# Altium PCB USB_Downloader_V1.2.PcbDoc
Units mil, origin at the board's own origin, x right, y up, seen from the top; angles counter-clockwise.
Board outline 2108 x 919.09 mil, 2 copper layers (Top Layer, Bottom Layer); 52 components, 75 nets, 262 pads, 73 vias.
Unrouted connection lines stored in the file: 1.
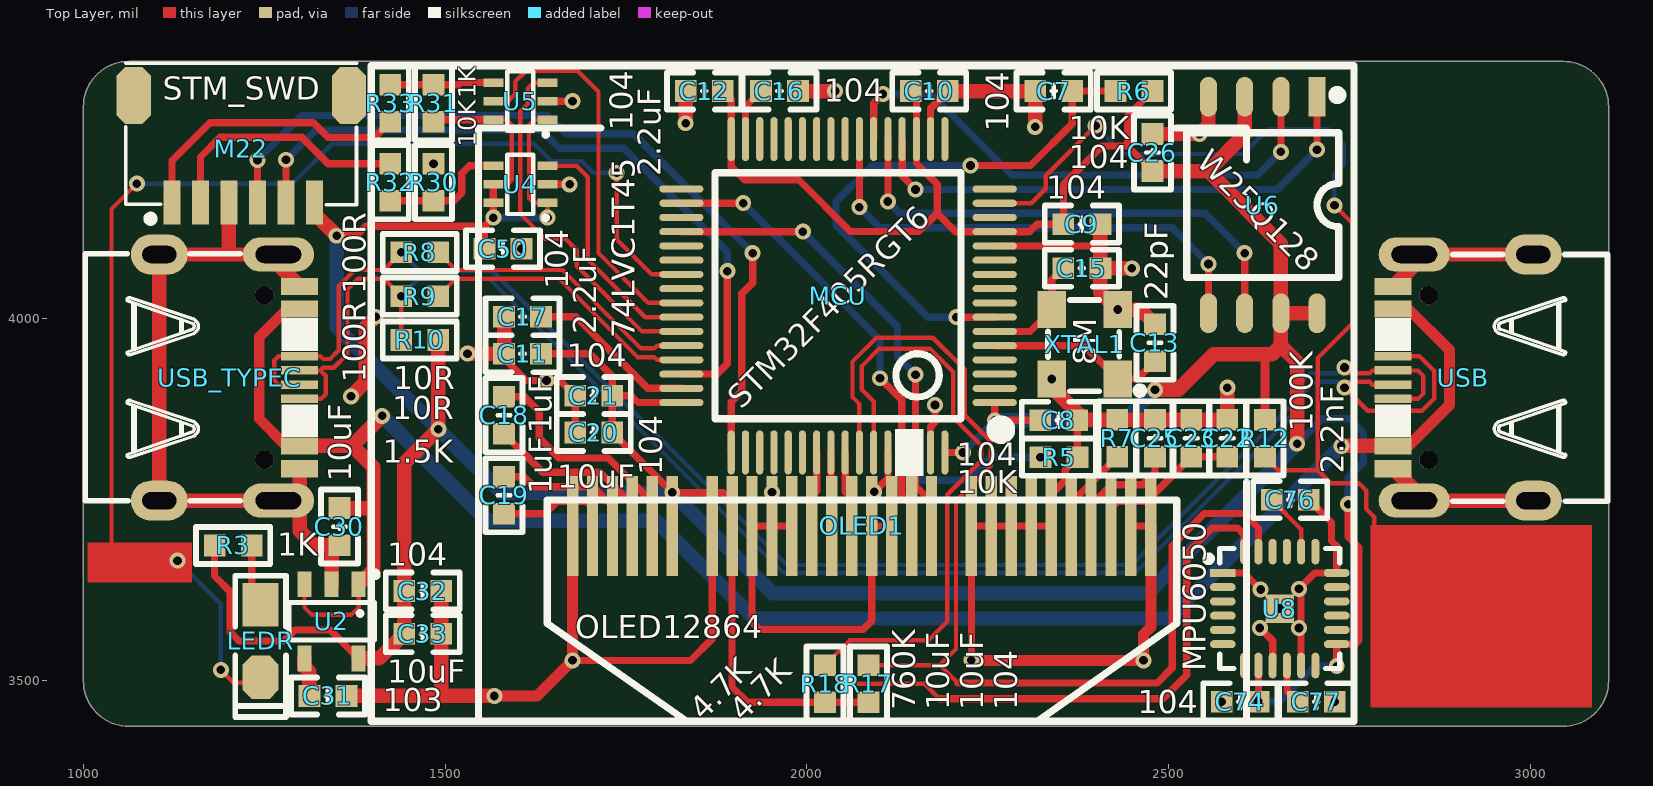
[diagram p0: Top Layer view]
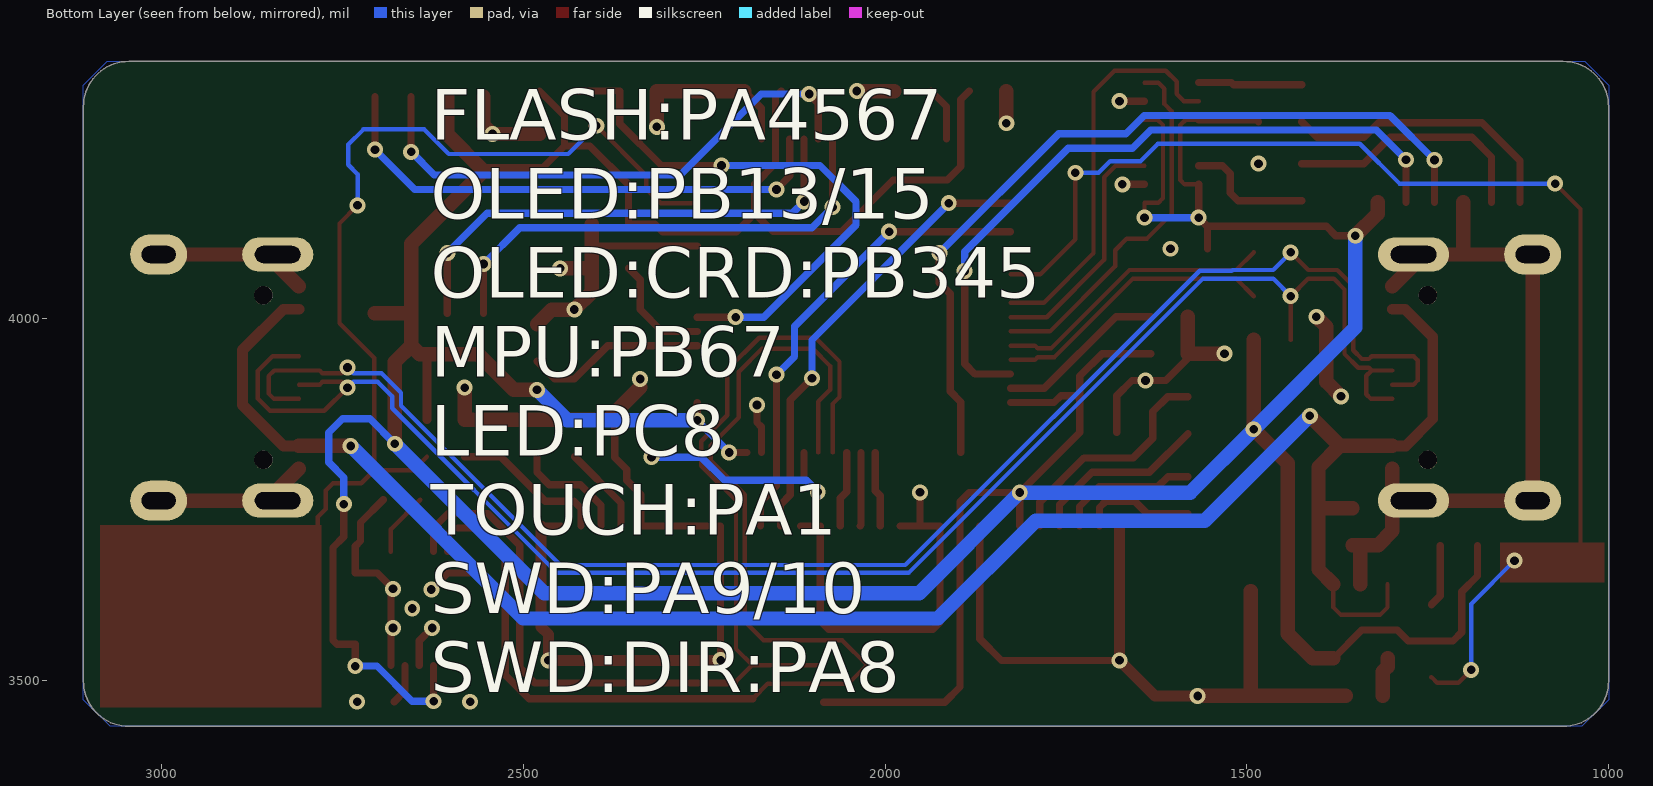
[diagram p1: Bottom Layer view, seen from below]

## Layer stack, top to bottom
Top Solder: solder mask 0.4, Solder Resist, Dk 3.5
Top Layer: signal copper 1.4
Dielectric 1: dielectric 12.6, FR-4, Dk 4.8
Bottom Layer: signal copper 1.4
Bottom Solder: solder mask 0.4, Solder Resist, Dk 3.5

## Board outline
1000,3498.9 1000,4292.01 cw(c1062.99,4292.01) 1062.99,4355 3045.01,4355 cw(c3045.01,4292.01) 3108,4292.01 3108,3498.9 cw(c3045.01,3498.9) 3045.01,3435.91 1062.99,3435.91 cw(c1062.99,3498.9)

## Design rules (kind name [scope] priority, off if disabled: settings)
AssemblyTestPointUsage [All] p0: scope1count=1 scope1_0_kind=Board scope1_0_value=Board scope2count=1 scope2_0_kind=Board scope2_0_value=Board commentlength=0
AssemblyTestpoint [All] p0: scope1count=1 scope1_0_kind=Board scope1_0_value=Board scope2count=1 scope2_0_kind=Board scope2_0_value=Board commentlength=0
Clearance [All] p0: scope1count=1 scope1_0_kind=Board scope1_0_value=Board scope2count=1 scope2_0_kind=Board scope2_0_value=Board commentlength=0 gap=10
Clearance [All] p1: gap=10 except(2: Arc-SMDPad SMDPad-SMDPad SMDPad-THPad SMDPad-Via SMDPad-Fill SMDPad-Region SMDPad-Text; 5: Track-Track Track-SMDPad Track-THPad Track-Via Track-Fill Track-Region Track-Text; 12: Arc-Poly Track-Poly SMDPad-Poly THPad-Poly Via-Poly Fill-Poly Poly-Poly)
ComponentClearance [All] p0: scope1count=1 scope1_0_kind=Board scope1_0_value=Board scope2count=1 scope2_0_kind=Board scope2_0_value=Board commentlength=0 gap=10 collisioncheckmode=3
DiffPairsRouting [All] p0 off: scope1count=1 scope1_0_kind=Board scope1_0_value=Board scope2count=1 scope2_0_kind=Board scope2_0_value=Board commentlength=63 // Protel DXP Scope 1 Expression Was: InDifferentialPair('US')
DiffPairsRouting DiffPair_USBDiffPairsRouting [All] p0 off: scope1count=1 scope1_0_kind=Board scope1_0_value=Board scope2count=1 scope2_0_kind=Board scope2_0_value=Board commentlength=65 // Protel DXP Scope 1 Expression Was: InDifferentialPair('USBB')
DiffPairsRouting DiffPairsRouting_1 [All] p0: scope1count=1 scope1_0_kind=Board scope1_0_value=Board scope2count=1 scope2_0_kind=Board scope2_0_value=Board commentlength=0
DiffPairsRouting DiffPairsRouting_1 [All] p1: maxlimit=6 minlimit=6 mostfreqgap=6 toplayer_minwidth=6 toplayer_maxwidth=6 toplayer_prefwidth=6 bottomlayer_minwidth=6 bottomlayer_maxwidth=6 bottomlayer_prefwidth=6 maxuncoupledlength=500
DiffPairsRouting DiffPair_USBDiffPairsRouting [InDifferentialPair('USBB')] p2: maxlimit=6 minlimit=6 mostfreqgap=6 toplayer_minwidth=6 toplayer_maxwidth=6 toplayer_prefwidth=6 bottomlayer_minwidth=6 bottomlayer_maxwidth=6 bottomlayer_prefwidth=6 maxuncoupledlength=500
DiffPairsRouting [InDifferentialPair('US')] p3: maxlimit=6 minlimit=6 mostfreqgap=6 toplayer_minwidth=6 toplayer_maxwidth=6 toplayer_prefwidth=6 bottomlayer_minwidth=6 bottomlayer_maxwidth=6 bottomlayer_prefwidth=6 maxuncoupledlength=500
FabricationTestPointUsage [All] p0: scope1count=1 scope1_0_kind=Board scope1_0_value=Board scope2count=1 scope2_0_kind=Board scope2_0_value=Board commentlength=0 valid=0 allowmultiple=FALSE
FabricationTestpoint [All] p0: scope1count=1 scope1_0_kind=Board scope1_0_value=Board scope2count=1 scope2_0_kind=Board scope2_0_value=Board commentlength=0 side=3 testpointundercomponent=TRUE minsize=40 maxsize=100 preferedsize=60 minholesize=0 maxholesize=40 preferedholesize=32 testpointgrid=1
FanoutControl Fanout_Default [All] p0: scope1count=1 scope1_0_kind=Board scope1_0_value=Board scope2count=1 scope2_0_kind=Board scope2_0_value=Board commentlength=30 // Fanout_Default (Default Rule)
FanoutControl Fanout_Small [All] p0 off: scope1count=1 scope1_0_kind=Board scope1_0_value=Board scope2count=1 scope2_0_kind=Board scope2_0_value=Board commentlength=84 // Protel DXP Scope 1 Expression Was: (CompPinCount < 5)   Fanout_Small (Default Rule)
FanoutControl Fanout_SOIC [All] p0 off: scope1count=1 scope1_0_kind=Board scope1_0_value=Board scope2count=1 scope2_0_kind=Board scope2_0_value=Board commentlength=71 // Protel DXP Scope 1 Expression Was: IsSOIC   Fanout_SOIC (Default Rule)
FanoutControl Fanout_LCC [All] p0 off: scope1count=1 scope1_0_kind=Board scope1_0_value=Board scope2count=1 scope2_0_kind=Board scope2_0_value=Board commentlength=69 // Protel DXP Scope 1 Expression Was: IsLCC   Fanout_LCC (Default Rule)
FanoutControl Fanout_BGA [All] p0 off: scope1count=1 scope1_0_kind=Board scope1_0_value=Board scope2count=1 scope2_0_kind=Board scope2_0_value=Board commentlength=69 // Protel DXP Scope 1 Expression Was: IsBGA   Fanout_BGA (Default Rule)
Height [All] p0: scope1count=1 scope1_0_kind=Board scope1_0_value=Board scope2count=1 scope2_0_kind=Board scope2_0_value=Board commentlength=0
HoleSize [All] p0: scope1count=1 scope1_0_kind=Board scope1_0_value=Board scope2count=1 scope2_0_kind=Board scope2_0_value=Board commentlength=0 absolutevalues=TRUE maxlimit=100 minlimit=1 maxpercent=80.000 minpercent=20.000
HoleToHoleClearance [All] p0: scope1count=1 scope1_0_kind=Board scope1_0_value=Board scope2count=1 scope2_0_kind=Board scope2_0_value=Board commentlength=0
LayerPairs [All] p0: scope1count=1 scope1_0_kind=Board scope1_0_value=Board scope2count=1 scope2_0_kind=Board scope2_0_value=Board commentlength=0 enforce=TRUE
MatchedLengths DiffPair_USBMatchedLengths_1 [All] p0 off: scope1count=1 scope1_0_kind=Board scope1_0_value=Board scope2count=1 scope2_0_kind=Board scope2_0_value=Board commentlength=65 tolerance=1000 amplitude=200 gap=20 style=90-Degree // Protel DXP Scope 1 Expression Was: InDifferentialPair ('USB')
MatchedLengths DiffPair_USBMatchedLengths [All] p0: scope1count=1 scope1_0_kind=Board scope1_0_value=Board scope2count=1 scope2_0_kind=Board scope2_0_value=Board commentlength=0 tolerance=1000 amplitude=200 gap=20 style=90-Degree
MatchedLengths DiffPair_USBMatchedLengths [All] p1: tolerance=1000 checknetsindiffpair=FALSE checkdiffpairvsdiffpair=TRUE checkxsignals=TRUE checkothers=TRUE
MatchedLengths DiffPair_USBMatchedLengths_1 [InDifferentialPair ('USB')] p2: tolerance=1000 checknetsindiffpair=FALSE checkdiffpairvsdiffpair=TRUE checkxsignals=TRUE checkothers=TRUE
MinimumSolderMaskSliver [All] p0: scope1count=1 scope1_0_kind=Board scope1_0_value=Board scope2count=1 scope2_0_kind=Board scope2_0_value=Board commentlength=0
NetAntennae [All] p0: scope1count=1 scope1_0_kind=Board scope1_0_value=Board scope2count=1 scope2_0_kind=Board scope2_0_value=Board commentlength=0
PasteMaskExpansion [All] p0: scope1count=1 scope1_0_kind=Board scope1_0_value=Board scope2count=1 scope2_0_kind=Board scope2_0_value=Board commentlength=0 expansion=0
PlaneClearance [All] p0: scope1count=1 scope1_0_kind=Board scope1_0_value=Board scope2count=1 scope2_0_kind=Board scope2_0_value=Board commentlength=0 clearance=20
PlaneConnect [All] p0: scope1count=1 scope1_0_kind=Board scope1_0_value=Board scope2count=1 scope2_0_kind=Board scope2_0_value=Board commentlength=0 planeconnectstyle=Direct reliefexpansion=20 reliefentries=4 reliefconductorwidth=10 reliefairgap=10
PlaneConnect [All] p1: planeconnectstyle=Direct reliefexpansion=20 reliefentries=4 reliefconductorwidth=10 reliefairgap=10
PolygonConnect [All] p0: scope1count=1 scope1_0_kind=Board scope1_0_value=Board scope2count=1 scope2_0_kind=Board scope2_0_value=Board commentlength=0 connectstyle=Direct reliefconductorwidth=10 reliefentries=4 polygonreliefangle="90 Angle"
PolygonConnect [All] p1: connectstyle=Direct reliefconductorwidth=10 reliefentries=4 polygonreliefangle="90 Angle" airgapwidth=10
RoomDefinition USB_Downloader [All] p0: scope1count=1 scope1_0_kind=ComponentClass scope1_0_value=USB_Downloader scope2count=1 scope2_0_kind=Board scope2_0_value=Board commentlength=0 region_x1=0 region_y1=0 region_x2=20000000 region_y2=10000000 confinementstyle=ConfineIn
RoomDefinition USB_Downloader [InComponentClass('USB_Downloader')] p1: confinementstyle=ConfineIn formatcopy=TRUE lockcomponents=FALSE outline 0,0 2000,0 2000,1000 0,1000
RoutingCorners [All] p0: scope1count=1 scope1_0_kind=Board scope1_0_value=Board scope2count=1 scope2_0_kind=Board scope2_0_value=Board commentlength=0 cornerstyle=45-Degree minsetback=100 maxsetback=100
RoutingLayers [All] p0: scope1count=1 scope1_0_kind=Board scope1_0_value=Board scope2count=1 scope2_0_kind=Board scope2_0_value=Board commentlength=0 top layer=Automatic bottom layer=Automatic
RoutingPriority [All] p0: scope1count=1 scope1_0_kind=Board scope1_0_value=Board scope2count=1 scope2_0_kind=Board scope2_0_value=Board commentlength=0
RoutingTopology [All] p0: scope1count=1 scope1_0_kind=Board scope1_0_value=Board scope2count=1 scope2_0_kind=Board scope2_0_value=Board commentlength=0 topology=Shortest
RoutingVias [All] p0: scope1count=1 scope1_0_kind=Board scope1_0_value=Board scope2count=1 scope2_0_kind=Board scope2_0_value=Board commentlength=0 holewidth=12 width=22 viastyle="Through Hole" minholewidth=12 minwidth=22 maxholewidth=200 maxwidth=500
RoutingVias [All] p1: holewidth=12 width=22 viastyle="Through Hole" minholewidth=12 minwidth=22 maxholewidth=200 maxwidth=500
ShortCircuit [All] p0: scope1count=1 scope1_0_kind=Board scope1_0_value=Board scope2count=1 scope2_0_kind=Board scope2_0_value=Board commentlength=0 allowed=FALSE
SilkToBoardRegionClearance [All] p0: scope1count=1 scope1_0_kind=Board scope1_0_value=Board scope2count=1 scope2_0_kind=Board scope2_0_value=Board commentlength=0
SilkToSilkClearance [All] p0: scope1count=1 scope1_0_kind=Board scope1_0_value=Board scope2count=1 scope2_0_kind=Board scope2_0_value=Board commentlength=0
SilkToSolderMaskClearance [All] p0 off: scope1count=1 scope1_0_kind=Board scope1_0_value=Board scope2count=1 scope2_0_kind=Board scope2_0_value=Board commentlength=44 // Protel DXP Scope 1 Expression Was: IsPad
SolderMaskExpansion [All] p0: scope1count=1 scope1_0_kind=Board scope1_0_value=Board scope2count=1 scope2_0_kind=Board scope2_0_value=Board commentlength=0 expansion=4
SolderMaskExpansion [All] p1: expansion=4
UnRoutedNet [All] p0: scope1count=1 scope1_0_kind=Board scope1_0_value=Board scope2count=1 scope2_0_kind=Board scope2_0_value=Board commentlength=0
UnpouredPolygon [All] p0: scope1count=1 scope1_0_kind=Board scope1_0_value=Board scope2count=1 scope2_0_kind=Board scope2_0_value=Board commentlength=0
Width [All] p0: scope1count=1 scope1_0_kind=Board scope1_0_value=Board scope2count=1 scope2_0_kind=Board scope2_0_value=Board commentlength=0 maxlimit=200 minlimit=6 preferedwidth=10
Width [All] p1: maxlimit=200 minlimit=6 preferedwidth=10 minimp=50.000000 maximp=50.000000 favimp=50.000000
28 further rules are at their usual default settings.

## Components (designator, comment, footprint, x,y, rotation, side; value= is the part's Value field where it differs from the comment)
C7 "104" "C 0603_L" 2341,4314.01 r0 top
C8 "104" "C 0603_L" 2348,3859 r180 top
C9 "104" "C 0603_L" 2380,4130 r180 top
C10 "104" "C 0603_L" 2169,4314 r180 top
C11 "104" "C 0603_L" 1607,3951 r0 top
C12 "104" "C 0603_L" 1858,4314.01 r0 top
C13 "22pF" "C 0603_L" 2481,3966 r270 top
C15 "22pF" "C 0603_L" 2380,4069 r180 top
C16 "2.2uF" "C 0603_L" 1962,4314 r180 top
C17 "2.2uF" "C 0603_L" 1607,4002 r0 top
C18 "1uF" "C 0603_L" 1581.41,3866 r270 top
C19 "1uF" "C 0603_L" 1581.41,3755.41 r270 top
C20 "104" "C 0603_L" 1705.41,3842 r0 top
C21 "10uF" "C 0603_L" 1705.41,3893 r0 top
C22 "104" "C 0603_L" 2581,3834 r270 top
C23 "10uF" "C 0603_L" 2531,3834 r270 top
C25 "10uF" "C 0603_L" 2481,3834 r270 top
C26 "104" "C 0603_L" 2477.58,4229 r90 top
C30 "10uF" "C 0603_L" 1354,3712 r270 top
C31 "103" "C 0603_L" 1338,3478 r180 top
C32 "104" "C 0603_L" 1469,3623 r180 top
C33 "10uF" "C 0603_L" 1469,3564 r180 top
C50 "104" "C 0603_L" 1580,4096 r180 top
C74 "104" "C 0603_L" 2599,3470 r0 top
C76 "2.2nF" "C 0603_L" 2668,3749 r180 top
C77 "104" "C 0603_L" 2704,3470 r0 top
LEDR "LED1" "LED 0805B" 1245,3554 r270 top
M22 "STM_SWD" SH1.0-6P 1122.53,4160 r0 top
MCU "STM32F405RGT6" "LQFP64 10X10_L" 2043,4031 r90 top
OLED1 "OLED12864" OLED_0.96 1676.12,3712.93 r0 top locked
R3 "1K" "R 0603_L" 1207,3686 r0 top
R5 "10K" "R 0603_L" 2348.41,3808 r180 top
R6 "10K" "R 0603_L" 2452,4314.01 r0 top
R7 "760K" "R 0603_L" 2429,3834 r270 top
R8 "10R" "R 0603_L" 1465,4091 r0 top
R9 "10R" "R 0603_L" 1465,4030.5 r0 top
R10 "1.5K" "R 0603_L" 1464.99,3970 r180 top
R12 "100K" "R 0603_L" 2633,3834 r90 top
R17 "4.7K" "R 0603_L" 2085,3495 r90 top
R18 "4.7K" "R 0603_L" 2025,3495 r90 top
R30 "10K" "R 0603_L" 1484,4188 r90 top
R31 "1K" "R 0603_L" 1484,4297 r270 top
R32 "100R" "R 0603_L" 1424,4188 r270 top
R33 "100R" "R 0603_L" 1424,4297 r90 top
U2 "CAT6219-330TD" SOT23-5L 1343,3581 r180 top
U4 "74LVC1T45" SOT363-6L 1604,4185 r180 top
U5 "74LVC1T45" SOT363-6L 1604,4300 r180 top
U6 "W25Q128" SOP8W_L 2630,4156.39 r270 top
U8 "MPU6050" "QFN24 4x4_N" 2653.47,3598.74 r270 top locked
USB "USB TypeC" "USB Type-C" 2907,3918 r90 top
USB_TYPEC "USB TypeC" "USB Type-C" 1202,3918 r270 top
XTAL1 "8M" "XTAL3225   无源" 2384,3964 r90 top

## Footprints (in the part's own frame and the unit in brackets; to place one, negate y for a bottom-side part, rotate by r counter-clockwise, add the part's x,y. Pads: shape width x height; smd on the part's side, far side on the other; paste and mask are expansions set on the pad)
"C 0603_L" [mil] "无极性贴片电容"
  rect 30x30 smd: 1(-25.59,0) 2(25.59,0)
  silkscreen extent -51,-26 51,26
"LED 0805B" [mil] "蓝色0805LED"
  rect 60x50 smd: 1(-50,0)
  oct 60x50 smd: 2(50,0)
  silkscreen extent -90,-35 105,35
"LQFP64 10X10_L" [mm]
  oval 0.25x1.55 smd: 1(-3.75,-5.5) 2(-3.25,-5.5) 3(-2.75,-5.5) 4(-2.25,-5.5) 5(-1.75,-5.5) 6(-1.25,-5.5) 7(-0.75,-5.5) 8(-0.25,-5.5) 9(0.25,-5.5) 10(0.75,-5.5) 11(1.25,-5.5) 12(1.75,-5.5) 13(2.25,-5.5) 14(2.75,-5.5) 15(3.25,-5.5) 16(3.75,-5.5) 33(3.75,5.5) 34(3.25,5.5) 35(2.75,5.5) 36(2.25,5.5) 37(1.75,5.5) 38(1.25,5.5) 39(0.75,5.5) 40(0.25,5.5) 41(-0.25,5.5) 42(-0.75,5.5) 43(-1.25,5.5) 44(-1.75,5.5) 45(-2.25,5.5) 46(-2.75,5.5) 47(-3.25,5.5) 48(-3.75,5.5)
  oval 1.55x0.25 smd: 17(5.5,-3.75) 18(5.5,-3.25) 19(5.5,-2.75) 20(5.5,-2.25) 21(5.5,-1.75) 22(5.5,-1.25) 23(5.5,-0.75) 24(5.5,-0.25) 25(5.5,0.25) 26(5.5,0.75) 27(5.5,1.25) 28(5.5,1.75) 29(5.5,2.25) 30(5.5,2.75) 31(5.5,3.25) 32(5.5,3.75) 49(-5.499,3.75) 50(-5.499,3.25) 51(-5.499,2.75) 52(-5.499,2.25) 53(-5.499,1.75) 54(-5.499,1.25) 55(-5.499,0.75) 56(-5.499,0.25) 57(-5.499,-0.25) 58(-5.499,-0.75) 59(-5.499,-1.25) 60(-5.499,-1.75) 63(-5.499,-3.25) 64(-5.499,-3.75)
  silkscreen extent -4.95,-5.97 4.32,4.32
OLED_0.96 [mm]
  rect 0.4x3.5 smd: 1(0,0) 2(0.7,0) 3(1.4,0) 4(2.1,0) 5(2.8,0) 6(3.5,0) 8(4.9,0) 9(5.6,0) 10(6.3,0) 11(7,0) 12(7.7,0) 13(8.4,0) 14(9.1,0) 15(9.8,0) 16(10.5,0) 17(11.2,0) 18(11.9,0) 19(12.6,0) 21(14,0) 22(14.7,0) 23(15.4,0) 24(16.1,0) 25(16.8,0) 26(17.5,0) 27(18.2,0) 28(18.9,0) 29(19.6,0) 30(20.3,0)
  silkscreen extent -3.3,-6.86 23.66,13.97
"QFN24 4x4_N" [mm] "24脚，长x宽x高：4x4x1mm，脚距：0.5mm"
  rect 0.28x0.9 smd: 1(-1.25,-2)
  oval 0.28x0.9 smd: 2(-0.75,-2) 3(-0.25,-2) 4(0.25,-2) 5(0.75,-2) 6(1.25,-2) 13(1.25,2) 14(0.75,2) 15(0.25,2) 16(-0.25,2) 17(-0.75,2) 18(-1.25,2)
  oval 0.9x0.28 smd: 7(2,-1.25) 8(2,-0.75) 9(2,-0.25) 10(2,0.25) 11(2,0.75) 12(2,1.25) 19(-2,1.25) 20(-2,0.75) 21(-2,0.25) 22(-2,-0.25) 23(-2,-0.75) 24(-2,-1.25)
  rect 1x1 smd: 25(0,0)
  silkscreen extent -2.11,-2.6 2.11,2.11
"R 0603_L" [mil] "1/10W贴片电阻"
  rect 30x30 smd: 1(-25.59,0) 2(25.59,0)
  silkscreen extent -51,-26 51,26
SH1.0-6P [mm]
  rect 0.6x1.55 smd: 1(0,0) 2(1,0) 3(2,0) 4(3,0) 5(4,0) 6(5,0)
  oct 1.2x2 smd: A(-1.346,3.759) B(6.21,3.759)
  silkscreen extent -1.63,-0.7 6.48,4.89
SOP8W_L [mm]
  rect 1.4x0.6 smd: 1(-3.8,1.905)
  oval 1.4x0.6 smd: 2(-3.8,0.635) 3(-3.8,-0.635) 4(-3.8,-1.905) 5(3.8,-1.905) 6(3.8,-0.635) 7(3.8,0.635) 8(3.8,1.905)
  silkscreen extent -3.99,-2.67 2.54,2.74
SOT23-5L [mm]
  rect 0.5x0.9 smd: 1(-0.95,-1.3) 2(0,-1.3) 3(0.95,-1.3) 4(0.95,1.3) 5(-0.95,1.3)
  silkscreen extent -1.6,-1.73 1.5,0.66
SOT363-6L [mm]
  rect 0.7x0.3 smd: 1(-0.95,0.65) 2(-0.95,0) 3(-0.95,-0.65) 4(0.95,-0.65) 5(0.95,0) 6(0.95,0.65)
  silkscreen extent -0.97,-1.04 0.46,1.24
"USB Type-C" [mm] "USB Type-C 12P/16P"
  rect 0.6x1.3 smd mask+0: 1(-3.2,2.462) 2(-2.4,2.462) 11(2.4,2.462) 12(3.2,2.462)
  rect 0.3x1.3 smd mask+0: 5(-0.75,2.462) 6(-0.25,2.463) 7(0.25,2.463) 8(0.75,2.462)
  oval 1.2x2.5 hole 0.6 slot 1.6 at 90 deg: SH1(-4.32,1.718) SH3(4.32,1.717)
  oval 1.4x2 hole 0.6 slot 1.2 at 90 deg: SH2(-4.32,-2.462) SH4(4.32,-2.462)
  round 0.65 hole 0.65 unplated mask+0: ""(-2.89,1.218) ""(2.89,1.218)
  silkscreen extent -4.34,-5.07 4.32,0.37
"XTAL3225   无源" [mil]
  rect 51.18x39.37 smd: 1(-48,-45.5) 2(48,-45.5) 3(48,45.5) 4(-48,45.5)
  silkscreen extent -69,-81 61,51

## Part data
C7 C8 C9 C10 C11 C12 C16 C17 C18 C19 C20 C21 C22 C23 C25 C26 C30 C31 C32 C33 C50 C74 C76 C77: library part C
C13 C15: library part CAP
LEDR: library part LED2, "Typical RED, GREEN, YELLOW, AMBER GaAs LED"
M22: library part HEAD6
MCU: "Flaah:256/RAM:48/IO:51"
R3 R5 R6 R7 R8 R9 R10 R12 R17 R18 R30 R31 R32 R33: library part R
U2: "3.3V 500mA LDO"
U4 U5: "1路双向电平转换"
U6: library part W25X16, "W25X16;SST25VF016;MX25L1605"
U8: "9轴运动处理传感器"
USB USB_TYPEC: library part "USB Type-C", "12P TypeC 母座"
XTAL1: library part XTAL-无源贴片, "无源贴片晶振"

## Via types
v1: diameter 22, hole 12, Top Layer to Bottom Layer, 73 vias

## Nets (pads, with @x,y where several pads share a name; then routed paths per layer and width w, separated by ;. In a path a pad name is that pad's centre, name@x,y a point inside that pad or via, vN(x,y) a via of type N, cw(c..) or ccw(c..) an arc to the next point about the centre after c; other vN are vias at no path point)
3D_INT: MCU.28 U8.12
BOOT0: MCU.60 R5.2 | length 312
  Top Layer w10: v1(2093,3760) 2111.9,3778.9 MCU.60
  Bottom Layer w10: v1(2093,3760) 2109,3776 2222,3776 2254,3808 v1(2322.82,3808)
GND: C7.1 C8.1 C9.1 C10.1 C11.1 C12.1 C13.1 C15.1 C16.1 C17.1 C20.1 C21.1 C22.1 C23.1 C25.1 C26.2 C30.2 C31.1 C32.1 C33.1 C50.1 C74.1 C76.1 C77.2 M22.3 MCU.12 MCU.18 MCU.63 OLED1.1 OLED1.8 OLED1.10 OLED1.11 OLED1.12 OLED1.16 OLED1.17 OLED1.21 OLED1.22 OLED1.23 OLED1.24 OLED1.25 OLED1.29 OLED1.30 R5.1 R7.1 R30.2 U2.2 U4.2 U5.2 U6.4 U8.1 U8.9 U8.11 U8.18 USB.1 USB.12 USB.SH1 USB.SH2 USB.SH3 USB.SH4 USB_TYPEC.1 USB_TYPEC.12 USB_TYPEC.SH1 USB_TYPEC.SH2 USB_TYPEC.SH3 USB_TYPEC.SH4 XTAL1.2 XTAL1.4 | length 6055.9
  Top Layer w10: C11.1 1581.41,3944.59 1612,3914 v1(1640,3914) 1658.82,3914 C21.1 C20.1 ; U4.2 v1(1672,4185) ; U5.2 v1(1676,4300) ; v1(1676.12,3527.12) 1839.12,3527.12 1869.03,3557.03 OLED1.8 ; v1(1951.71,3759.29) OLED1.11 ; OLED1.12 OLED1.11 ; OLED1.17 OLED1.16 2089.5,3581.5 2078,3570 1934,3570 1924.15,3579.85 OLED1.10 OLED1.11 ; MCU.63 2170.96,3849.96 2177,3856 v1(2177,3880) ; MCU.18 2170.96,4290.37 C10.1 ; v1@2227,3527.12 v1(2227.3,3527.42) OLED1.21 OLED1.23 OLED1.24 OLED1.25 2337.53,3756.53 2357,3776 2357,3791 R5.1 2373.59,3808.41 C8.1 ; MCU.12 2405.5,4099.91 2405.59,4100 ; XTAL1.4@2338.5,3904.5 v1(2338.5,3916) ; OLED1.29 OLED1.30 ; U8.1 2604.05,3647.95 v1(2627,3625) ; v1(2626,3572) 2643.63,3554.37 U8.9 ; U8.11 2683,3623 v1(2680,3626) 2701.95,3647.95 U8.18 2732.21,3684.79 2725,3692 2725,3717.6 C76.1
  Top Layer w15: v1(1568,3478) 1627,3478 v1(1676.12,3527.12) OLED1.1 ; v1@2227,3527.12 v1(2465.12,3527.12) 2465.12,3563.12 2475.33,3573.33 OLED1.30
  Top Layer w20: M22.3 1201.27,4088.08 ; USB_TYPEC.SH3 USB_TYPEC.SH4 USB_TYPEC.SH2 1201.27,4088.08 ; USB_TYPEC.SH1 USB_TYPEC.SH1@1254.85,4088.08 ; USB_TYPEC.12 1298.95,3706.05 1318.59,3686.41 C30.2@1343,3686.41 ; USB_TYPEC.1 USB_TYPEC.SH1@1254.85,4088.08 ; U2.2 C30.2@1343,3686.41 ; C30.2 C30.2@1343,3686.41 ; C31.1 1494,3478 ; v1(1370,3892) 1390,3912 1390,3988 v1(1404,4002) ; C32.1 1494.59,3478.6 1494,3478 ; v1(1531,3951) C11.1 C17.1 ; v1(1568,3478) 1494,3478 ; v1(1832.41,4269.41) C12.1 ; C16.1 v1(2039,4314) ; C10.1 C7.1 v1(2315.41,4264.41) ; XTAL1.4@2338.5,3904.5 2383.41,3859.59 R7.1 C23.1 C22.1 v1(2581,3904) ; C9.1 2405.59,4100 C15.1 ; v1(2449,4069) C15.1 ; C26.2 v1(2542.59,4254.59) 2555,4267 U6.4 ; C13.1 2460.59,4012 v1(2429.5,4012) 2405.59,4035.91 C15.1 ; USB.1 2839.38,3762.69 USB.SH1 USB.SH2 ; USB.12 2839.38,4073.32 USB.SH3 USB.SH4 ; 1201.27,4088.08 USB_TYPEC.SH1@1254.85,4088.08
  other v1: 2573.41,3470 2729.59,3470 2680,3572 2653.47,3598.74 1605.59,4096 1484,4213.59
IIC_SCL: MCU.58 R17.2 U8.23 | length 1554.8
  Top Layer w6: MCU.58 2072.53,3881.47 2063,3891 2063,3940 2096,3973 2174,3973 2218,3929 2218,3866 2254,3830 2254,3796 2206,3748 2206,3543 2183.59,3520.59 ; R17.2 2183.59,3520.59 ; 2208,3496 2208,3496.17 2183.59,3520.59
  Top Layer w10: 2208,3496 2484,3496 2505,3517 2505,3686 2549,3730 2604,3730 2623.94,3710.06 U8.23
IIC_SDA: MCU.59 R18.2 U8.24 | length 1673.3
  Top Layer w6: MCU.59 2092.22,3884.78 2076,3901 2076,3934 2100,3958 2170,3958 2202,3926 2202,3863 2241,3824 2241,3803 2194,3756 2194,3581 2168,3555 2059.42,3555 R18.2 2050.59,3495 2162,3495 2183,3474 2184,3475
  Top Layer w10: 2183,3474 2492,3474 2525,3507 2525,3675 2560,3710 2595,3710 2604.26,3700.74 U8.24
JTCK: M22.4 MCU.49 | length 1134.9
  Top Layer w10: M22.4 v1(1240.64,4218.64) ; MCU.49 1895.37,3884.37 1910,3899 1910,4034 1925,4049 v1(1925,4090)
  Bottom Layer w10: v1(1240.64,4218.64) 1302,4280 1642,4280 1667,4255 1760,4255 v1(1925,4090)
JTMS: M22.5 MCU.46 | length 980
  Top Layer w10: M22.5 v1(1280.01,4219.01) ; MCU.46 1875.74,3922.74 1890,3937 v1(1890,4065)
  Bottom Layer w10: v1(1280.01,4219.01) 1321,4260 1633,4260 1658,4235 1747,4235 1890,4092 v1(1890,4065)
NetC18_1: C18.1 OLED1.5 | length 319.8
  Top Layer w10: C18.1 1609.41,3891.59 1630,3871 1630,3834 1657,3807 1725,3807 1786.35,3745.65 OLED1.5
NetC18_2: C18.2 OLED1.4 | length 247.3
  Top Layer w10: C18.2 1634.82,3787 1714,3787 1758.79,3742.21 OLED1.4
NetC19_1: C19.1 OLED1.3 | length 193.7
  Top Layer w10: C19.1 1609,3781 1623,3767 1704,3767 1731.24,3739.76 OLED1.3
NetC19_2: C19.2 OLED1.2 | length 158.4
  Top Layer w10: C19.2 1637.82,3729.82 1655,3747 1695,3747 1703.68,3738.32 OLED1.2
NetC22_2: C22.2 C23.2 OLED1.28 | length 214.6
  Top Layer w10: OLED1.28 2420.21,3737.21 2430,3747 2469.58,3747 C23.2 C22.2
NetC25_2: C25.2 OLED1.27 | length 157.3
  Top Layer w10: OLED1.27 2392.65,3741.65 2421,3770 2464,3770 2481,3787 C25.2
NetC31_2: C31.2 U2.4 | length 54.6
  Top Layer w20: U2.4 1305.6,3518.4 1312.41,3511.59 C31.2
NetC76_2: C76.2 U8.20 | length 88.3
  Top Layer w6: C76.2 2683,3708.42 U8.20
NetC77_1: C77.1 U8.10 | length 56.3
  Top Layer w10: U8.10 2663.32,3485.09 C77.1
NetLEDR_1: LEDR.1 R3.2 | length 87.1
  Top Layer w10: R3.2 1232.59,3616.41 LEDR.1
NetM22_1: M22.1 R33.1 | length 397.9
  Top Layer w10: M22.1 1122.53,4217.53 1175,4270 1318,4270 1338,4250 1402.6,4250 R33.1
NetM22_2: M22.2 R32.1 | length 351.3
  Top Layer w10: M22.2 1161.9,4222.9 1189,4250 1302,4250 1338.41,4213.59 R32.1
NetOLED1_26: OLED1.26 R7.2 | length 121.9
  Top Layer w10: OLED1.26 2365.09,3744.51 R7.2
NetR8_1: R8.1 USB.5 USB.7 USB_TYPEC.5 USB_TYPEC.7 | length 2150.2
  Top Layer w6: USB_TYPEC.7 1269.84,3908.16 1264,3914 1264,3942 1269.53,3947.53 USB_TYPEC.5 1327.54,3947.53 1331.38,3943.69 1341,3943.69 1353,3955.69 1353,4044.72 1375.03,4066.75 1415.16,4066.75 v1(1439.41,4091) ; v1(2743,3932) 2751,3924 2777.62,3924 2781.46,3927.84 USB.7 2844.16,3927.84 2852,3920 2852,3896 2844.47,3888.47 USB.5
  Bottom Layer w6: v1(1439.41,4091) 1463.65,4066.75 1519.97,4066.75 1520.97,4065.75 1565.25,4065.75 1972,3659 2449,3659 2669,3879 2669,3896.97 2696.03,3924 2735,3924 v1(2743,3932)
NetR9_1: R9.1 R10.2 USB.6 USB.8 USB_TYPEC.6 USB_TYPEC.8 | length 2314.6
  Top Layer w6: USB_TYPEC.8 1328.47,3888.47 1335,3895 1335,3920.38 1327.54,3927.84 ; USB_TYPEC.6 1327.54,3927.84 ; R10.2 v1(1439.41,4030.5) 1415.16,4054.75 1380,4054.75 1365,4039.75 1365,3950.71 1345.97,3931.69 1331.38,3931.69 1327.54,3927.84 ; USB.6 2781.46,3908.16 2777.62,3912 2751,3912 v1(2743,3904) 2775,3872 2850,3872 2867,3889 2867,3927 2846.47,3947.53 USB.8
  Bottom Layer w6: v1(1439.41,4030.5) 1463.65,4054.75 1560.7,4054.75 1967.44,3648 2453.56,3648 2681,3875.44 2681,3892 2701,3912 2735,3912 v1(2743,3904)
OLED_CS: MCU.55 OLED1.13 | length 104.3
  Top Layer w10: OLED1.13 2006.83,3754.83 2013.48,3761.48 MCU.55
OLED_D0: MCU.34 OLED1.18 | length 627.9
  Top Layer w10: MCU.34 v1(1912.04,4158.96) ; v1(2101,3917) 2131,3887 2131,3756 2144.62,3742.38 OLED1.18
  Bottom Layer w10: v1(1912.04,4158.96) 2101,3970 v1(2101,3917)
OLED_D1: MCU.36 OLED1.19 | length 648.2
  Top Layer w10: MCU.36 v1(1994.41,4119.59) ; v1(2150.02,3921.98) 2150.02,3767.98 2172.18,3745.82 OLED1.19
  Bottom Layer w10: v1(1994.41,4119.59) 2125,3989 2125,3947 v1(2150.02,3921.98)
OLED_DC: MCU.57 OLED1.15 | length 105.3
  Top Layer w10: MCU.57 2052.85,3760.15 2061.94,3751.06 OLED1.15
OLED_RST: MCU.56 OLED1.14 | length 102.1
  Top Layer w10: MCU.56 2033.16,3714.16 OLED1.14
OSC_IN: C13.2 MCU.5 XTAL1.1 | length 250.7
  Top Layer w10: MCU.5 2383.39,3962.11 XTAL1.1 2456.58,3916 C13.2
OSC_OUT: C15.2 MCU.6 XTAL1.3 | length 155.1
  Top Layer w10: MCU.6 2308.3,3981.8 XTAL1.3 2338.5,4053.09 C15.2
PA0: MCU.14
PA1: MCU.15 R12.1 | length 1298.7
  Top Layer w6: MCU.15 2309.96,4158.96 2330,4179 2330,4197 v1(2399,4266) ; R12.1 2651.41,3790 2706,3790 ; v1(2729,4156) 2754,4131 2754,3993 2706,3945 2706,3790 ; 2784,3689 2784,3725.38 2773,3736.38 2773,3762 2763,3772 2724,3772 2706,3790
  Bottom Layer w6: v1(2399,4266) 2438,4227 2603,4227 2637,4261 2721,4261 2742,4240 2742,4212 2729,4199 v1(2729,4156)
PA2: MCU.16
PA3: MCU.17
PA4: MCU.20 U6.1 | length 727.9
  Top Layer w10: MCU.20 2131.59,4196.41 v1(2150,4178) ; v1(2705,4233) U6.1
  Bottom Layer w10: v1(2150,4178) 2650,4178 v1(2705,4233)
PA5: MCU.21 U6.6 | length 692
  Top Layer w10: v1(2111.9,4161.43) MCU.21 ; U6.6 v1(2605,4090)
  Bottom Layer w10: v1(2111.9,4161.43) 2128.33,4145 2550,4145 v1(2605,4090)
PA6: MCU.22 U6.2 | length 753.4
  Top Layer w10: MCU.22 2092.22,4297.22 v1(2105,4310) ; v1(2655,4230) U6.2
  Bottom Layer w10: v1(2105,4310) 2171,4310 2283,4198 2623,4198 v1(2655,4230)
PA7: MCU.23 U6.5 | length 677.2
  Top Layer w10: v1(2072.53,4153.47) MCU.23 ; U6.5 v1(2555,4075)
  Bottom Layer w10: v1(2072.53,4153.47) 2101,4125 2505,4125 v1(2555,4075)
PA8: MCU.41 U5.5 | length 550.8
  Top Layer w6: U5.5 1587,4300 1597,4310 1597,4327 1612,4342 1683,4342 1712,4313 1712,4090 1780.83,4021.17 MCU.41
PA9: MCU.42 U4.3 | length 338.5
  Top Layer w6: U4.3 1681.41,4210.59 1697,4195 1697,4081 1776.52,4001.48 MCU.42
PA10: MCU.43 U5.3 | length 510.7
  Top Layer w6: U5.3 1622.59,4325.59 1614,4317 1614,4296 1604,4286 1604,4144 1638,4110 1666,4110 1682,4094 1682,4072 1772.2,3981.8 MCU.43
PA11: MCU.44 R8.2 | length 392.5
  Top Layer w6: R8.2 1514.84,4066.75 1662.25,4066.75 1770.73,3958.27 1789.13,3958.27 1792.97,3962.11 MCU.44
PA12: MCU.45 R9.2 | length 392.5
  Top Layer w6: R9.2 1514.84,4054.75 1657.28,4054.75 1765.76,3946.27 1789.13,3946.27 1792.97,3942.43 MCU.45
PA15: MCU.50
PB0: MCU.26
PB1: MCU.27
PB8: 
PB9: 
PB10: MCU.29
PB11: MCU.30
PB12: MCU.33
PB14: MCU.35
PC0: MCU.8
PC1: MCU.9
PC2: MCU.10
PC3: MCU.11
PC4: MCU.24
PC5: MCU.25
PC6: MCU.37
PC7: MCU.38
PC8: LEDR.2 MCU.39 | length 1763.2
  Top Layer w6: v1(1074,4186) 1039,4151 1039,3680 1054,3665 v1(1130,3665) ; v1(1190,3514) 1208,3496 1237,3496 LEDR.2 ; v1(1737,4201) 1737,4109 1785.46,4060.54 MCU.39
  Bottom Layer w6: v1(1074,4186) 1289,4186 1344,4241 1623,4241 1647,4217 1689,4217 1705,4201 v1(1737,4201) ; v1(1130,3665) 1190,3605 v1(1190,3514)
PC9: MCU.40
PC10: MCU.51
PC11: MCU.52
PC12: MCU.53
PC13: MCU.2
PC14: MCU.3
PC15: MCU.4
PD2: MCU.54
RESET: C7.2 MCU.7 R6.1 | length 780.7
  Top Layer w10: v1(2206.48,4001.48) MCU.7 ; v1(2226,4211) 2309,4211 2366.59,4268.59 C7.2 R6.1
  Bottom Layer w10: v1(2206.48,4001.48) 2167.52,4001.48 2040,4129 2040,4161 2090,4211 v1(2226,4211)
SWD_TCK: R30.1 R32.2 U4.4 | length 178.4
  Top Layer w10: R32.2 R30.1 1512.41,4162.41 1523,4173 1523,4200 1533.59,4210.59 U4.4
SWD_TMS: R31.1 R33.2 U5.4 | length 143.8
  Top Layer w10: R33.2 1518.59,4322.59 1521.59,4325.59 U5.4
VCAP1: C16.2 MCU.31 | length 75.3
  Top Layer w10: MCU.31 1915.05,4292.64 C16.2
VCAP2: C17.2 MCU.47 | length 234.9
  Top Layer w10: C17.2 1681,4002 1779.94,3903.06 MCU.47
VCC3.3: C8.2 C9.2 C10.2 C11.2 C12.2 C20.2 C21.2 C26.1 C32.2 C33.2 C50.2 C74.2 M22.6 MCU.1 MCU.13 MCU.19 MCU.32 MCU.48 MCU.64 OLED1.6 OLED1.9 R3.1 R6.2 R10.1 R12.2 R17.1 R18.1 R31.2 U2.5 U4.1 U4.5 U4.6 U5.1 U5.6 U6.3 U6.7 U6.8 U8.8 U8.13 | length 7511.8
  Top Layer w6: U4.5 1586,4185 1592,4191 1592,4267 1584.59,4274.41 U5.6 ; v1(1641.4,4139) U4.1 1622.59,4159.41 1616,4166 1616,4267 1623.41,4274.41 U5.1
  Top Layer w10: R3.1 1181.41,3643.59 1203,3622 1203,3566 1215,3554 1277,3554 1292,3569 1341.22,3569 U2.5 ; v1(1350,4114) 1377,4114 1390,4127 1554.6,4127 ; R31.2 1486.99,4274.41 U5.6 ; C50.2 1554.41,4126.81 1554.6,4127 ; U4.5 U4.6 v1(1566.6,4139) 1554.6,4127 ; C11.2 1700,3951 1731,3920 C21.2 ; OLED1.6 v1(1813.91,3759.09) ; MCU.48 1766.63,3883.37 1757,3893 C21.2 ; C12.2 1895.37,4302.23 MCU.32 1895.37,4209.63 1914,4191 1989,4191 2060,4120 2155,4120 2180,4145 ; R17.1 R18.1 1917.59,3469.41 1896.59,3490.41 OLED1.9 1896.59,3746.41 1883.91,3759.09 v1(1813.91,3759.09) ; C10.2 2151.27,4306.14 MCU.19 2151.27,4213.73 2180,4185 2180,4145 ; MCU.64 v1(2215.51,3814.49) ; MCU.1 v1(2259.52,3859) C8.2 ; C26.1 2443,4237.99 ; R6.2 2443,4279.42 2443,4237.99 ; U8.8 v1(2623.95,3470.64) C74.2 ; v1(2732.21,3519.21) U8.13 2757.53,3549.53 2763,3555 2763,3683 2748,3698 v1(2748,3743) ; C21.2 C20.2 v1(1813.91,3759.09) ; 2180,4145 2205.41,4119.59 MCU.13 2307.59,4119.59 2318,4130 C9.2 2354.41,4184.41 2407.99,4237.99 2443,4237.99
  Top Layer w12: R12.2 2633,3950
  Top Layer w20: M22.6 1319.38,4144.62 v1(1350,4114) ; U2.5 1409.23,3529.82 C33.2 C32.2 1443.41,3799.41 v1(1490.59,3846.59) R10.1 ; C26.1 2554.41,4203.41 ; v1(2481,3901) 2513,3901 2562,3950 2633,3950 2643,3950 2655,3962 ; U6.3 2605,4254 2554.41,4203.41 ; v1(2677.5,3826.5) 2677.5,3939.51 2655,3962 ; U6.8 U6.7 ; 2554.41,4203.41 2655,4102.81 U6.7 ; 2655,3962 U6.7
  Bottom Layer w10: v1(1566.6,4139) v1(1641.4,4139) ; v1(2215.51,3814.49) 2259.52,3858.5 v1(2259.52,3859) ; v1(2623.95,3470.64) 2653.64,3470.64 2702.21,3519.21 v1(2732.21,3519.21) ; v1(2677.5,3826.5) 2712,3861 2750,3861 2769,3842 2769,3801 2748,3780 v1(2748,3743)
  Bottom Layer w20: v1(1350,4114) 1350,3987.18 v1(1490.59,3846.59) 1578.09,3759.09 v1(1813.91,3759.09) 1953,3620 2471,3620 v1(2677.5,3826.5) ; v1(2259.52,3859) 2439,3859 v1(2481,3901)
VUSB: C30.1 U2.1 U2.3 USB.2 USB.11 USB_TYPEC.2 USB_TYPEC.11 | length 2684.5
  Top Layer w6: U2.3 1305.6,3600.4 1316,3590 1370,3590 1380.4,3600.4 U2.1
  Top Layer w15: USB_TYPEC.11 1280.49,3823.51 1243,3861 1243,3974 1281.49,4012.49 USB_TYPEC.2 ; USB.2 2831.51,3823.51 2888,3880 2888,3956 2831.51,4012.49 USB.11
  Top Layer w20: USB_TYPEC.11 1371.49,3823.51 ; C30.1 1400.41,3737.59 1401,3737 ; U2.1 1401,3652.78 1401,3737 ; v1(1413,3865.02) 1371.49,3823.51 ; v1(2738.51,3823.51) USB.2 ; 1371.49,3823.51 1401,3794 1401,3737
  Bottom Layer w20: v1(1413,3865.02) 1558.02,3720 1792,3720 1927,3585 2500,3585 v1(2738.51,3823.51)
pads on no net: M22.A M22.B U8.2 U8.3 U8.4 U8.5 U8.6 U8.7 U8.14 U8.15 U8.16 U8.17 U8.19 U8.21 U8.22 U8.25 USB. USB_TYPEC.

## Polygon pours and split planes (outlines as drawn)
GND on Bottom Layer "AutoNaming" (solid, remove dead copper, pour order 0): 3075,4355 1032.95,4354.95 1000,4322 1000,3473 1037.09,3435.91 3070.91,3435.91 3107.99,3472.99 3107.99,4322.01

## Other copper
Top Layer:
  rectangle net PC8: 1006,3635 1150,3690
  rectangle net PA1: 2779,3462 3085,3714

## Silkscreen, mask and mechanical layers (free items; w line width, h text height)
Top Overlay:
  rectangle: 2122,3782 2161,3847
  rectangle: 1274,3955 1324,4000
  rectangle: 1274,3836 1324,3881
  rectangle: 2785,3836 2835,3881
  rectangle: 2785,3955 2835,4000
  lines w10: 1397.73,3442.93 1397.73,4349 2756,4349 2756,3442.93 1397.73,3442.93
Bottom Overlay:
  text "FLASH:PA4567" at 2628,4224 h120
  text "OLED:PB13/15" at 2628,4114.86 h120
  text "OLED:CRD:PB345" at 2628,4005.71 h120
  text "MPU:PB67" at 2627.89,3896.57 h120
  text "LED:PC8" at 2628,3787.43 h120
  text "TOUCH:PA1" at 2628,3678.29 h120
  text "SWD:PA9/10" at 2628.22,3569.14 h120
  text "SWD:DIR:PA8" at 2628.22,3460 h120
Top Solder:
  text "V1.2" at 2764,4251 h120 r315
  text "LED" at 1008,3638 h60
  text "USB" at 2798,3606 h150
  text "IAP" at 2799,3477 h150
Mechanical 1:
  circle w5: c1106,3554 r62.99
  circle w5: c2998,4247.01 r62.99
  lines w5: 1000,3498.9 ccw(c1062.99,3498.9) 1062.99,3435.91 3045.01,3435.91 ccw(c3045.01,3498.9) 3108,3498.9 3108,4292.01 ccw(c3045.01,4292.01) 3045.01,4355 1062.99,4355 ccw(c1062.99,4292.01) 1000,4292.01 1000,3498.9